# Altium PCB PX4FMUv2.4.6.PcbDoc (part 3 of 3)
Units mil, origin at the board's own origin, x right, y up, seen from the top; angles counter-clockwise.
Board outline 2756 x 1595 mil, 6 copper layers (Top, Ground, Horizontal, Vertical, Power, Bottom), stack 65.355 mil thick; 292 components, 264 nets, 1164 pads, 473 vias.
Unrouted connection lines stored in the file: 12.
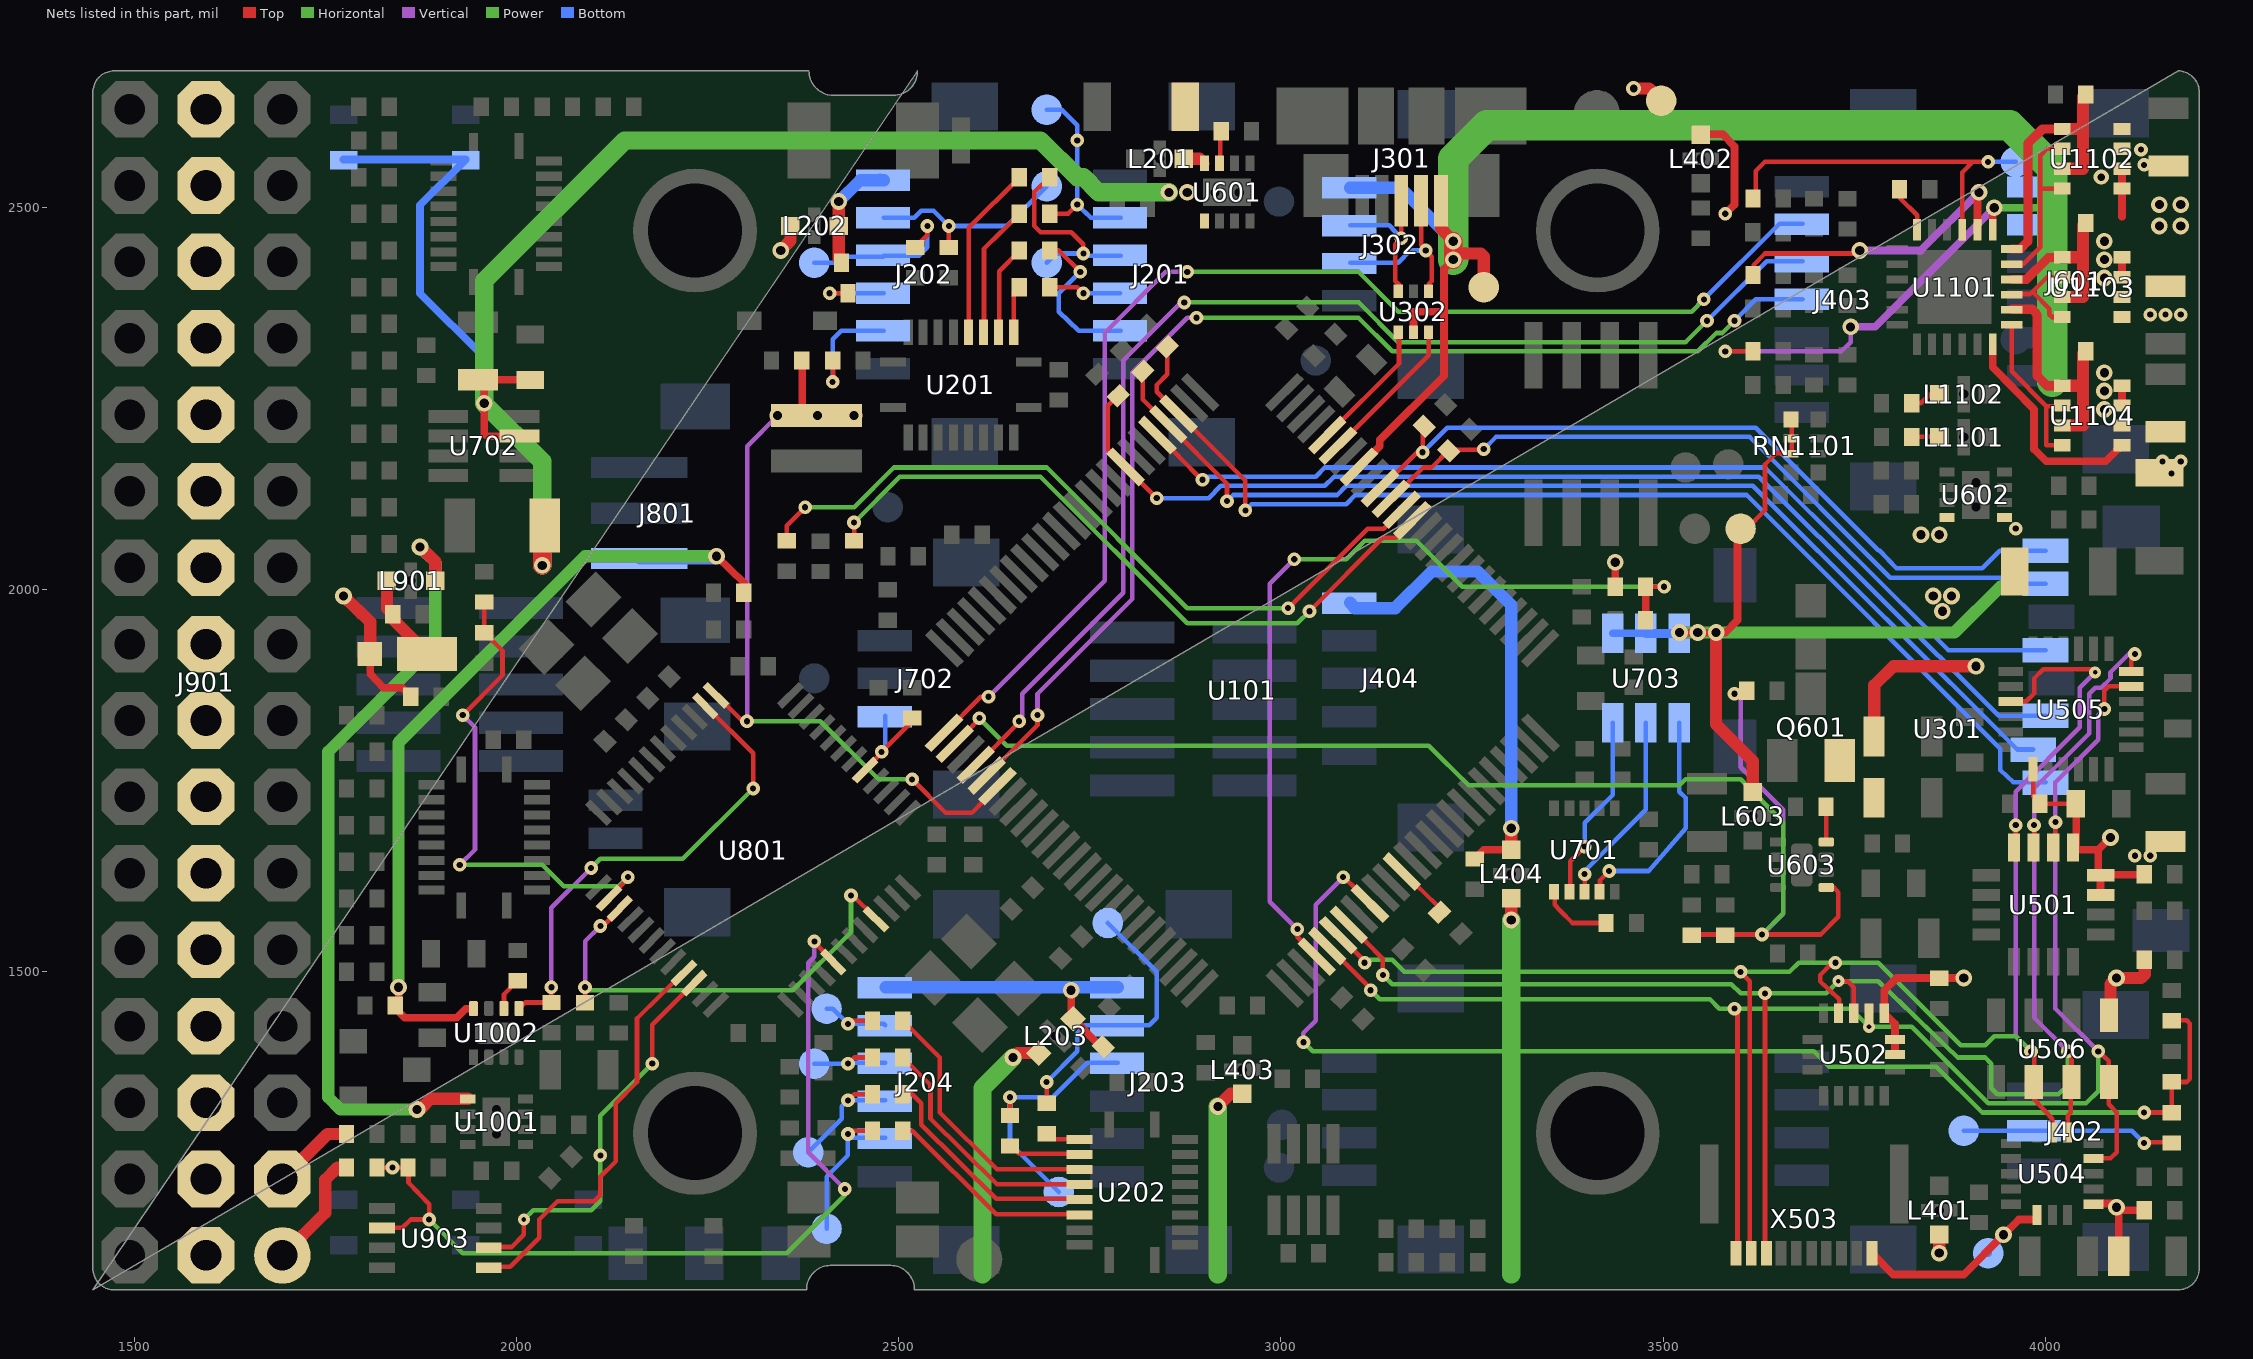
[diagram p7: the nets of this part, all layers, seen from the top]

## Via types
v1: diameter 17.84/17.84/17.84/17.84/17.84/17.84 (per signal layer), hole 8, Top to Bottom, 334 vias
v2: diameter 21.84/21.84/21.84/21.84/21.84/21.84 (per signal layer), hole 12, Top to Bottom, 129 vias
v3: diameter 15.84/15.84/15.84/15.84/15.84/15.84 (per signal layer), hole 6, Top to Bottom, 8 vias
v4: diameter 19.84/19.84/19.84/19.84/19.84/19.84 (per signal layer), hole 10, Top to Bottom, 2 vias

## Nets (pads, with @x,y where several pads share a name; then routed paths per layer and width w, separated by ;. In a path a pad name is that pad's centre, name@x,y a point inside that pad or via, vN(x,y) a via of type N, cw(c..) or ccw(c..) an arc to the next point about the centre after c; other vN are vias at no path point) (continued)
N$85: R203.P$1 U201.15 | length 231
  Top w6: U201.15@2591.4,2336.37 2591.4,2473.37 R203.P$1@2658.4,2539.37
N$86: R210.P$1 U201.14 | length 174.8
  Top w6: U201.14@2611.4,2336.37 2611.4,2445.37 R210.P$1@2658.4,2491.37
N$87: R204.P$1 U201.13 | length 118.2
  Top w6: U201.13@2631.4,2336.37 2631.4,2416.37 R204.P$1@2658.4,2443.37
N$88: R211.P$1 U201.12 | length 62.6
  Top w6: U201.12@2650.4,2336.37 2650.4,2388.37 R211.P$1@2658.4,2395.37
N$89: R207.P$1 U202.13 | length 96.3
  Top w6: R207.P$1@2645.4,1272.37 2657.4,1261.37 U202.13@2737.4,1261.37
N$90: R214.P$1 U202.12 | length 47.3
  Top w6: R214.P$1@2693.4,1288.37 2701.4,1280.37 U202.12@2737.4,1280.37
N$91: R205.P$1 U202.17 | length 276.9
  Top w6: R205.P$1@2505.4,1291.37 2517.4,1291.37 2627.4,1182.37 U202.17@2737.4,1182.37
N$92: R212.P$1 U202.16 | length 304.9
  Top w6: R212.P$1@2505.4,1339.37 2517.4,1339.37 2529.4,1327.37 2529.4,1299.37 2627.4,1202.37 U202.16@2737.4,1202.37
N$93: R206.P$1 U202.15 | length 326.2
  Top w6: R206.P$1@2505.4,1387.37 2541.4,1351.37 2541.4,1307.37 2628.4,1221.37 U202.15@2737.4,1221.37
N$94: R213.P$1 U202.14 | length 354.2
  Top w6: R213.P$1@2505.4,1435.37 2549.4,1391.37 2553.4,1387.37 2553.4,1315.37 2628.4,1241.37 U202.14@2737.4,1241.37
N$95: R704.P$2 U701.6 | length 96.3
  Top w6: U701.6@3358.4,1605.37 3358.4,1587.37 3365.4,1579.37 3381.4,1563.37 R704.P$2@3426.4,1563.37
N$96: R617.P$1 U601.7 | length 42.8
  Top w6: U601.7@2920.4,2557.37 2920.4,2597.37 R617.P$1@2922.4,2599.37
N$97: C1105.P$1 U1101.P$18 U1102.P$1 U1102.P$3 | length 359
  Top w12: U1101.P$18@3956.4,2445.37 3967.4,2445.37 3977.4,2455.37 3977.4,2583.37 3996.4,2602.37 U1102.P$1@4022.4,2602.37
  Top w16: U1102.P$3@4022.4,2550.37 4049.4,2550.37 4049.4,2602.37 ; U1102.P$1@4022.4,2602.37 4049.4,2602.37 ; C1105.P$1@4053.4,2647.37 4049.4,2644.37 4049.4,2602.37
N$98: D403.C J404.1 L404.P$2 | length 625.3
  Top w10: D403.C@3253.4,1647.37 3265.4,1659.37 L404.P$2@3301.4,1659.37
  Top w16: L404.P$2@3301.4,1659.37 v2(3301.4,1687.37)
  Bottom w16: J404.1@3090.4,1982.37 3096.4,1975.37 3149.4,1975.37 3197.4,2023.37 3257.4,2023.37 3301.4,1979.37 v2(3301.4,1687.37)
N$99: J901.4 R910.P$2 | length 109.4
  Top w16: J901.4@1693.4,1228.37 1752.4,1287.37 R910.P$2@1778.4,1287.37
N$100: D203.C J203.1 J204.1 L203.P$2 | length 400.9
  Top w10: v2(2725.4,1475.37) 2725.4,1440.37 2728.4,1438.37 2764.4,1401.37 D203.C@2767.4,1401.37
  Bottom w10: v2@2722.4,1479.37 v2(2725.4,1475.37)
  Bottom w16: J204.1@2482.4,1479.37 v2@2722.4,1479.37 ; v2(2725.4,1475.37) 2729.4,1479.37 J203.1@2786.4,1479.37
N$101: D202.C J202.1 L202.P$2 | length 158.4
  Top w10: D202.C@2421.4,2432.37 D202.C@2425.4,2427.37 ; L202.P$2@2421.4,2475.37 L202.P$2@2421.4,2476.37
  Top w16: D202.C@2421.4,2432.37 L202.P$2@2421.4,2475.37 ; L202.P$2@2421.4,2476.37 v2(2421.4,2507.37)
  Bottom w10: J202.1@2475.4,2539.37 J202.1@2480.4,2535.37
  Bottom w16: v2(2421.4,2507.37) 2449.4,2535.37 J202.1@2480.4,2535.37
N$102: L1102.P$2 R1102.P$2 | length 42
  Top w6: R1102.P$2@3825.4,2243.37 3837.4,2243.37 3849.4,2255.37 L1102.P$2@3862.4,2255.37
N$103: L1101.P$2 R1101.P$2 | length 37
  Top w6: R1101.P$2@3825.4,2199.37 L1101.P$2@3862.4,2199.37
N$104: C1002.P$1 U1002.6 | length 44.5
  Top w6: U1002.6@1983.4,1451.37 1983.4,1470.37 C1002.P$1@2001.4,1488.37
N$105: R1115.P$2 U1101.P$24 | length 62.1
  Top w6: R1115.P$2@3810.4,2523.37 3810.4,2511.37 3832.4,2489.37 U1101.P$24@3832.4,2470.37
N$106: C1106.P$1 U1101.P$16 U1103.P$1 U1103.P$3 | length 231
  Top w10: 4049.4,2382.37 4049.4,2383.37
  Top w12: U1101.P$16@3956.4,2405.37 3975.4,2405.37 4004.4,2434.37 U1103.P$1@4022.4,2434.37
  Top w16: U1103.P$3@4022.4,2382.37 4049.4,2382.37 ; U1103.P$1@4022.4,2434.37 4049.4,2434.37 ; 4049.4,2383.37 4049.4,2434.37 ; C1106.P$1@4053.4,2479.37 4049.4,2476.37 4049.4,2434.37
N$107: C1107.P$1 U1101.P$14 U1104.P$1 U1104.P$3 | length 307.6
  Top w10: 4049.4,2214.37 4049.4,2215.37
  Top w12: U1101.P$14@3956.4,2366.37 3983.4,2366.37 3989.4,2359.37 3989.4,2279.37 4002.4,2266.37 U1104.P$1@4022.4,2266.37
  Top w16: U1104.P$3@4022.4,2214.37 4049.4,2214.37 ; U1104.P$1@4022.4,2266.37 4049.4,2266.37 ; 4049.4,2215.37 4049.4,2266.37 ; C1107.P$1@4053.4,2311.37 4049.4,2308.37 4049.4,2266.37
N$109: U1101.P$13 U1104.P$2 U1104.P$4 | length 219.4
  Top w6: U1101.P$13@3956.4,2346.37 3956.4,2285.37 4001.4,2239.37 ; U1104.P$4@4022.4,2188.37 4001.4,2188.37 4001.4,2239.37 ; U1104.P$2@4022.4,2240.37 4022.4,2239.37 4001.4,2239.37
N$110: D903.C D904.CATHODE L901.P$1 | length 118
  Top w10: D903.C@1838.4,1960.37 D903.C@1838.4,1967.37
  Top w16: L901.P$1@1830.4,2011.37 1830.4,1975.37 D903.C@1838.4,1967.37 ; D903.C@1838.4,1960.37 D904.CATHODE@1883.4,1915.37
N$113: U1101.P$15 U1103.P$2 U1103.P$4 | length 132.5
  Top w6: U1101.P$15@3956.4,2386.37 3980.4,2386.37 3983.4,2389.37 ; U1103.P$4@4022.4,2356.37 4008.4,2356.37 4005.4,2359.37 4005.4,2367.37 3983.4,2389.37 ; U1103.P$2@4022.4,2408.37 4002.4,2408.37 3983.4,2389.37
N$115: U1101.P$17 U1102.P$2 U1102.P$4 | length 228.3
  Top w6: U1101.P$17@3956.4,2425.37 3971.4,2425.37 3993.4,2447.37 3993.4,2523.37 ; U1102.P$4@4022.4,2524.37 3994.4,2524.37 3993.4,2523.37 ; U1102.P$2@4022.4,2576.37 4002.4,2576.37 3993.4,2567.37 3993.4,2523.37
OTG_DM1: J301.D- J302.3 U302.1 | length 236.8
  Top w6: J301.D-@3183.4,2509.37 3183.4,2450.37 v1(3189.4,2443.37) ; U302.1@3193.4,2390.37 3193.4,2399.37 3197.4,2403.37 3197.4,2435.37 v1(3189.4,2443.37) ; v1@3193.4,2440.37 v1(3189.4,2443.37)
  Bottom w6: J302.3@3090.4,2427.37 3153.4,2427.37 3169.4,2443.37 v1(3189.4,2443.37)
OTG_DP1: J301.D+ J302.2 U302.3 | length 207.5
  Top w6: U302.3@3154.4,2390.37 3154.4,2399.37 3149.4,2403.37 3149.4,2451.37 v1(3157.4,2459.37) ; J301.D+@3157.4,2509.37 v1(3157.4,2459.37) ; v1(3157.4,2459.37) 3154.4,2456.37 v1(3157.4,2459.37)
  Bottom w6: J302.2@3090.4,2476.37 3141.4,2476.37 v1(3157.4,2459.37)
OTG_FS_DM: U101.70 U302.6 | length 197.9
  Top w6: U101.70@3075.4,2188.37 3193.4,2306.37 U302.6@3193.4,2337.37
OTG_FS_DP: U101.71 U302.4 | length 173.5
  Top w6: U101.71@3061.4,2202.37 3154.4,2295.37 U302.4@3154.4,2337.37
PB2-BOOT1: R102.P$1 U101.37 | length 75
  Top w6: U101.37@3158.4,1631.37 3208.4,1582.37 R102.P$1@3208.4,1577.37
PPM-SBUS-PROT: J901.1 R909.P$2 | length 157.8
  Top w16: J901.1@1693.4,1128.37 1749.4,1184.37 1749.4,1227.37 1765.4,1243.37 R909.P$2@1778.4,1243.37
PPM_INPUT: D901.C R909.P$1 U801.29 U903.2 | length 1170.7
  Top w6: R909.P$1@1817.4,1243.37 v1(1837.4,1243.37) 1858.4,1243.37 1858.4,1223.37 1885.4,1195.37 v1(1885.4,1175.37) 1861.4,1175.37 1850.4,1164.37 U903.2@1824.4,1164.37 ; v1(2389.4,1539.37) 2389.4,1538.37 U801.29@2414.4,1513.37
  Horizontal w6: v1(1885.4,1175.37) 1929.4,1131.37 2353.4,1131.37 2429.4,1207.37 v1(2429.4,1215.37)
  Vertical w6: v1(2389.4,1539.37) 2389.4,1519.37 2381.4,1511.37 2381.4,1263.37 v1(2429.4,1215.37)
PRESSURE_SENS: C401.P$1 R403.P$2 R406.P$1 U101.34 | length 1626.9
  Top w6: v1(3081.4,1623.37) 3082.4,1623.37 U101.34@3117.4,1589.37 ; v1(4129.4,1315.37) 4130.4,1315.37 4165.4,1315.37 4165.4,1356.37 4166.4,1355.37 4185.4,1355.37 4189.4,1359.37 4189.4,1431.37 4185.4,1436.37 R403.P$2@4165.4,1436.37
  Horizontal w6: v1(3029.4,1407.37) 3041.4,1395.37 3697.4,1395.37 3717.4,1375.37 3857.4,1375.37 3917.4,1315.37 v1(4129.4,1315.37)
  Vertical w6: v1(3029.4,1407.37) 3029.4,1419.37 3045.4,1435.37 3045.4,1587.37 v1(3081.4,1623.37)
PRESSURE_SENS_IN: ADC_PR.P$1 J402.2 R406.P$2 | length 279
  Top w6: v1(4129.4,1275.37) 4130.4,1276.37 R406.P$2@4165.4,1276.37
  Bottom w6: ADC_PR.P$1@3893.4,1291.37 3986.4,1291.37 4113.4,1291.37 v1(4129.4,1275.37)
RGB_LED_3: U701.9 U703.C1 | length 298
  Top w6: U701.9@3417.4,1605.37 3417.4,1619.37 v1(3429.4,1631.37)
  Bottom w6: v1(3429.4,1631.37) 3481.4,1631.37 3529.4,1687.37 3529.4,1727.37 3521.4,1735.37 U703.C1@3521.4,1825.37
RGB_LED_4: U701.8 U703.C2 | length 253.1
  Top w6: U701.8@3397.4,1605.37 v1(3397.4,1627.37)
  Bottom w6: v1(3397.4,1627.37) 3397.4,1631.37 3477.4,1711.37 U703.C2@3477.4,1825.37
RGB_LED_14: U701.7 U703.C3 | length 243.2
  Top w6: U701.7@3378.4,1605.37 3378.4,1644.37 v1(3397.4,1663.37)
  Bottom w6: v1(3397.4,1663.37) 3397.4,1694.37 3434.4,1731.37 U703.C3@3434.4,1825.37
RSSI_IN: R901.P$1 U801.15 U801.33 | length 619.5
  Top w6: R901.P$1@2089.4,1459.37 v1(2089.4,1479.37) ; v1(2109.4,1559.37) 2112.4,1559.37 U801.15@2136.4,1583.37 ; v1(2437.4,1599.37) 2439.4,1599.37 U801.33@2470.4,1569.37
  Horizontal w6: v1(2089.4,1479.37) 2093.4,1475.37 2361.4,1475.37 2437.4,1551.37 v1(2437.4,1599.37)
  Vertical w6: v1(2089.4,1479.37) 2089.4,1539.37 v1(2109.4,1559.37)
RX-VDD_5V5: J901.2
SAFETY: J702.3 R713.P$1 U801.41 | length 142.1
  Top w6: U801.41@2456.4,1764.37 2477.4,1786.37 v1(2477.4,1787.37) 2517.4,1827.37 R713.P$1@2517.4,1832.37
  Bottom w6: v1(2477.4,1787.37) 2482.4,1792.37 J702.3@2482.4,1834.37
SBUS_INPUT: U801.22 U903.6 | length 520.9
  Top w6: U903.6@1963.4,1139.37 1993.4,1139.37 2009.4,1155.37 v3(2009.4,1175.37) ; v1(2177.4,1379.37) 2177.4,1430.37 U801.22@2233.4,1486.37
  Horizontal w6: v3(2009.4,1175.37) 2021.4,1187.37 2097.4,1187.37 2109.4,1199.37 v1(2109.4,1259.37) 2109.4,1311.37 v1(2177.4,1379.37)
SBUS_OUTPUT: U801.21 U903.5 | length 536.9
  Top w6: U903.5@1963.4,1113.37 1991.4,1113.37 2029.4,1151.37 2029.4,1175.37 2053.4,1199.37 2101.4,1199.37 2109.4,1207.37 2109.4,1231.37 2129.4,1251.37 2129.4,1327.37 2157.4,1355.37 2157.4,1438.37 U801.21@2219.4,1499.37
SDIO_CK: U101.80 U301.5 | length 1292.1
  Top w6: U101.80@2838.4,2202.37 2896.4,2143.37 v1(2897.4,2143.37)
  Bottom w6: v1(2897.4,2143.37) 2901.4,2147.37 3045.4,2147.37 3057.4,2159.37 3633.4,2159.37 3873.4,1920.37 U301.5@4000.4,1920.37
SDIO_CMD: R303.P$1 U101.83 U301.3 | length 1471.3
  Top w6: R303.P$1@2787.4,2254.37 2773.4,2240.37 2773.4,2183.37 2796.4,2160.37 v1(2837.4,2119.37)
  Bottom w6: v1(2837.4,2119.37) 2905.4,2119.37 2921.4,2135.37 3057.4,2135.37 3069.4,2147.37 3073.4,2147.37 3625.4,2147.37 3939.4,1834.37 U301.3@4000.4,1834.37
SDIO_D0: R304.P$1 U101.65 U301.7 | length 968.5
  Top w6: U101.65@3144.4,2118.37 3186.4,2159.37 3197.4,2159.37 3220.4,2182.37 3264.4,2182.37 v1(3265.4,2183.37)
  Bottom w6: v1(3265.4,2183.37) 3281.4,2199.37 3613.4,2199.37 3797.4,2015.37 3941.4,2015.37 3950.4,2007.37 U301.7@4000.4,2007.37
SDIO_D1: R305.P$1 U101.66 U301.8 | length 1024.5
  Top w6: U101.66@3130.4,2132.37 3178.4,2179.37 v1(3185.4,2179.37) 3185.4,2211.37 R305.P$1@3188.4,2214.37
  Bottom w6: v1(3185.4,2179.37) 3217.4,2211.37 3621.4,2211.37 3781.4,2051.37 3783.4,2050.37 3805.4,2027.37 3917.4,2027.37 3940.4,2050.37 U301.8@4000.4,2050.37
SDIO_D2: R301.P$1 U101.78 U301.1 | length 1496
  Top w6: R301.P$1@2851.4,2318.37 2851.4,2281.37 2837.4,2267.37 2837.4,2258.37 2866.4,2229.37 2953.4,2142.37 v1(2953.4,2103.37)
  Bottom w6: v1(2953.4,2103.37) 2961.4,2111.37 3085.4,2111.37 3097.4,2123.37 3609.4,2123.37 3941.4,1791.37 3941.4,1763.37 3958.4,1747.37 U301.1@4000.4,1747.37
SDIO_D3: R302.P$1 U101.79 U301.2 | length 1422.5
  Top w6: R302.P$1@2819.4,2286.37 2819.4,2248.37 2852.4,2215.37 2929.4,2138.37 v1(2929.4,2115.37)
  Bottom w6: v1(2929.4,2115.37) 2937.4,2123.37 3073.4,2123.37 3085.4,2135.37 3617.4,2135.37 3963.4,1790.37 U301.2@3984.4,1790.37
SERIAL1_CTS: J201.4 R211.P$2 | length 95.3
  Top w6: R211.P$2@2697.4,2395.37 2733.4,2395.37 v1(2741.4,2387.37)
  Bottom w6: v1(2741.4,2387.37) J201.4@2789.4,2387.37
SERIAL1_RTS: J201.5 R204.P$2 | length 206.3
  Top w6: R204.P$2@2697.4,2443.37 2709.4,2443.37 v1(2737.4,2415.37)
  Bottom w6: v1(2737.4,2415.37) 2709.4,2387.37 2709.4,2363.37 2735.4,2338.37 J201.5@2790.4,2338.37
SERIAL1_RX: J201.3 R203.P$2 S1RX.P$1 | length 261.5
  Top w6: R203.P$2@2697.4,2539.37 2677.4,2520.37 2677.4,2475.37 2685.4,2467.37 2725.4,2467.37 2741.4,2451.37 v1(2741.4,2439.37)
  Bottom w6: S1RX.P$1@2693.4,2427.37 2705.4,2439.37 v1(2741.4,2439.37) 2745.4,2436.37 J201.3@2790.4,2436.37
SERIAL1_TX: J201.2 R210.P$2 S1TX.P$1 | length 257
  Top w6: R210.P$2@2697.4,2491.37 2721.4,2491.37 v1(2733.4,2503.37)
  Bottom w6: S1TX.P$1@2693.4,2627.37 2713.4,2627.37 2733.4,2607.37 v1(2733.4,2587.37) v1(2733.4,2503.37) 2751.4,2486.37 J201.2@2790.4,2486.37
SERIAL2_CTS: J202.4 R208.P$2 | length 96
  Top w6: v1(2409.4,2387.37) R208.P$2@2434.4,2387.37
  Bottom w6: v1(2409.4,2387.37) J202.4@2479.4,2387.37 J202.4@2480.4,2387.37
SERIAL2_RTS: J202.5 R201.P$2 | length 156
  Top w6: v1(2413.4,2271.37) 2414.4,2272.37 R201.P$2@2414.4,2299.37
  Bottom w6: v1(2413.4,2271.37) 2413.4,2327.37 2424.4,2338.37 J202.5@2480.4,2338.37
SERIAL2_RX: J202.3 R202.P$2 S2RX.P$1 | length 218.9
  Top w6: R202.P$2@2521.4,2447.37 2537.4,2463.37 v1(2537.4,2475.37)
  Bottom w6: S2RX.P$1@2389.4,2427.37 2425.4,2427.37 2433.4,2435.37 2479.4,2435.37 2480.4,2436.37 2526.4,2436.37 2537.4,2447.37 v1(2537.4,2475.37)
SERIAL2_TX: J202.2 R209.P$2 S2TX.P$1 | length 274.6
  Top w6: R209.P$2@2565.4,2447.37 v1(2565.4,2475.37)
  Bottom w6: J202.2@2480.4,2486.37 2520.4,2486.37 2529.4,2495.37 2545.4,2495.37 v1(2565.4,2475.37) 2641.4,2475.37 S2TX.P$1@2693.4,2527.37
SERIAL3_RX: J203.3 R207.P$2 S3RX.P$1 | length 334.1
  Top w6: R207.P$2@2645.4,1311.37 v1(2645.4,1335.37)
  Bottom w6: S3RX.P$1@2709.4,1211.37 2645.4,1275.37 v1(2645.4,1335.37) 2701.4,1335.37 2746.4,1380.37 J203.3@2786.4,1380.37
SERIAL3_TX: J203.2 R214.P$2 S3TX.P$1 | length 371.4
  Top w6: R214.P$2@2693.4,1327.37 v1(2693.4,1355.37)
  Bottom w6: v1(2693.4,1355.37) 2733.4,1395.37 2733.4,1419.37 2743.4,1429.37 2786.4,1429.37 2827.4,1429.37 2837.4,1439.37 2837.4,1499.37 S3TX.P$1@2773.4,1563.37
SERIAL4_RX: J204.3 R206.P$2 S4RX.P$1 | length 129.7
  Top w6: v1(2433.4,1379.37) 2441.4,1387.37 R206.P$2@2466.4,1387.37
  Bottom w6: S4RX.P$1@2389.4,1379.37 v1(2433.4,1379.37) 2434.4,1380.37 J204.3@2482.4,1380.37
SERIAL4_TX: J204.2 R213.P$2 S4TX.P$1 | length 120.8
  Top w6: v1(2433.4,1431.37) 2437.4,1435.37 R213.P$2@2466.4,1435.37
  Bottom w6: S4TX.P$1@2405.4,1451.37 2413.4,1451.37 v1(2433.4,1431.37) 2480.4,1431.37 J204.2@2482.4,1429.37
SERIAL5_RX: J204.5 R205.P$2 S5_RX.P$1 | length 221.1
  Top w6: v1(2433.4,1287.37) 2437.4,1291.37 R205.P$2@2466.4,1291.37
  Bottom w6: S5_RX.P$1@2405.4,1163.37 2405.4,1231.37 2433.4,1259.37 v1(2433.4,1287.37) 2439.4,1282.37 J204.5@2482.4,1282.37
SERIAL5_TX: J204.4 R212.P$2 S5_TX.P$1 | length 174.9
  Top w6: v1(2433.4,1331.37) 2441.4,1339.37 R212.P$2@2466.4,1339.37
  Bottom w6: S5_TX.P$1@2381.4,1263.37 2425.4,1307.37 2425.4,1323.37 v1(2433.4,1331.37) 2481.4,1331.37 J204.4@2482.4,1331.37
SERIAL_FMU_TO_IO: R804.P$2 U101.63 | length 915.3
  Top w6: R804.P$2@2441.4,2063.37 v1(2441.4,2087.37) ; v1(3037.4,1971.37) 3133.4,2067.37 3149.4,2067.37 U101.63@3172.4,2090.37
  Horizontal w6: v1(2441.4,2087.37) 2501.4,2147.37 2685.4,2147.37 2877.4,1955.37 3021.4,1955.37 v1(3037.4,1971.37)
SERIAL_IO_TO_FMU: R803.P$2 U101.64 | length 986.4
  Top w6: R803.P$2@2353.4,2063.37 2353.4,2083.37 v1(2377.4,2107.37) ; v1(3009.4,1975.37) 3113.4,2079.37 3134.4,2079.37 U101.64@3158.4,2104.37
  Horizontal w6: v1(2377.4,2107.37) 2441.4,2107.37 2493.4,2159.37 2693.4,2159.37 2877.4,1975.37 v1(3009.4,1975.37)
SPI_EXT_MISO: J403.3 U101.4 | length 1593.8
  Top w6: U101.4@2602.4,1770.37 2657.4,1826.37 v1(2657.4,1827.37)
  Horizontal w6: v1(2873.4,2375.37) 3101.4,2375.37 3153.4,2323.37 3529.4,2323.37 v1(3557.4,2351.37)
  Vertical w6: v1(2657.4,1827.37) 2661.4,1831.37 2661.4,1863.37 2793.4,1995.37 2793.4,2299.37 2869.4,2375.37 v1(2873.4,2375.37)
  Bottom w6: v1(3557.4,2351.37) 3635.4,2429.37 J403.3@3682.4,2429.37
SPI_EXT_MOSI: J403.4 U101.5 | length 1558.9
  Top w6: U101.5@2615.4,1756.37 2681.4,1822.37 v1(2681.4,1835.37)
  Horizontal w6: v1(2889.4,2355.37) 3101.4,2355.37 3145.4,2311.37 3545.4,2311.37 3569.4,2335.37 3577.4,2335.37 v1(3593.4,2351.37)
  Vertical w6: v1(2681.4,1835.37) 2681.4,1863.37 2805.4,1987.37 2805.4,2283.37 2877.4,2355.37 v1(2889.4,2355.37)
  Bottom w6: v1(3593.4,2351.37) 3621.4,2379.37 J403.4@3682.4,2379.37
SPI_EXT_SCK: J403.2 U101.1 | length 1630.7
  Top w6: U101.1@2560.4,1812.37 2607.4,1859.37 v1(2617.4,1859.37)
  Horizontal w6: v1(2877.4,2415.37) 3101.4,2415.37 3153.4,2363.37 3537.4,2363.37 v1(3553.4,2379.37)
  Vertical w6: v1(2617.4,1859.37) 2769.4,2011.37 2769.4,2335.37 2849.4,2415.37 v1(2877.4,2415.37)
  Bottom w6: v1(3553.4,2379.37) 3652.4,2478.37 J403.2@3682.4,2478.37
SPI_INT_MISO: U101.31 U501.4 U502.4 U504.7 U505.9 U506.6 X503.9 | length 2293.4
  Top w6: U101.31@3075.4,1547.37 3109.4,1513.37 v1(3109.4,1511.37) ; v1(3601.4,1499.37) 3613.4,1487.37 3613.4,1143.37 3616.4,1141.37 X503.9@3616.4,1131.37 ; v1(3725.4,1511.37) 3721.4,1511.37 3705.4,1495.37 3705.4,1487.37 3730.4,1463.37 U502.4@3730.4,1445.37 ; U505.9@3955.4,1853.37 3975.4,1853.37 3985.4,1863.37 3985.4,1883.37 3997.4,1895.37 4061.4,1895.37 v3(4065.4,1891.37) ; U501.4@3961.4,1660.37 3959.4,1662.37 3961.4,1665.37 v1(3961.4,1691.37) ; v1(3981.4,1395.37) 3985.4,1392.37 3985.4,1356.37 3985.4,1332.37 4009.4,1307.37 U504.7@4009.4,1289.37
  Horizontal w6: v1(3109.4,1511.37) 3113.4,1515.37 3145.4,1515.37 3161.4,1499.37 v1(3601.4,1499.37) 3665.4,1499.37 3677.4,1511.37 v1(3725.4,1511.37) 3781.4,1511.37 3889.4,1403.37 3921.4,1403.37 3933.4,1415.37 3961.4,1415.37 v1(3981.4,1395.37)
  Vertical w6: v1(3981.4,1395.37) 3961.4,1415.37 v1(3961.4,1691.37) 3961.4,1735.37 4045.4,1819.37 4045.4,1871.37 v3(4065.4,1891.37)
SPI_INT_MOSI: U101.32 U501.3 U502.3 U504.6 U505.24 U506.7 X503.8 | length 2294.7
  Top w6: U101.32@3089.4,1561.37 3133.4,1516.37 v1(3133.4,1495.37) ; v1(3633.4,1471.37) 3633.4,1143.37 3636.4,1141.37 X503.8@3636.4,1131.37 ; v3(3729.4,1487.37) 3741.4,1487.37 3749.4,1479.37 U502.3@3749.4,1445.37 ; U501.3@3985.4,1667.37 3985.4,1662.37 3985.4,1663.37 v1(3985.4,1691.37) ; U504.6@4029.4,1289.37 4029.4,1311.37 4033.4,1315.37 4033.4,1356.37 4034.4,1356.37 4034.4,1391.37 v1(4029.4,1395.37) ; U505.24@4112.4,1893.37 4112.4,1910.37 v1(4117.4,1915.37)
  Horizontal w6: v1(3133.4,1495.37) 3145.4,1483.37 3589.4,1483.37 3601.4,1471.37 v1(3633.4,1471.37) 3713.4,1471.37 v3(3729.4,1487.37) 3781.4,1487.37 3885.4,1387.37 3921.4,1387.37 3929.4,1379.37 3929.4,1347.37 3937.4,1339.37 4017.4,1339.37 4029.4,1351.37 v1(4029.4,1395.37)
  Vertical w6: v1(4029.4,1395.37) 3985.4,1439.37 v1(3985.4,1691.37) 3985.4,1739.37 4057.4,1811.37 4057.4,1863.37 4065.4,1871.37 4073.4,1871.37 4085.4,1883.37 4085.4,1891.37 4109.4,1915.37 v1(4117.4,1915.37)
SPI_INT_SCK: U101.30 U501.2 U502.2 U504.4 U505.23 U506.8 X503.10 | length 2261.7
  Top w6: U101.30@3061.4,1533.37 3117.4,1477.37 v1(3117.4,1475.37) ; v1(3593.4,1451.37) 3597.4,1447.37 3597.4,1147.37 3596.4,1146.37 X503.10@3596.4,1131.37 ; v3(3769.4,1427.37) 3769.4,1428.37 U502.2@3769.4,1445.37 ; U501.2@4010.4,1662.37 4013.4,1666.37 v1(4013.4,1695.37) ; U504.4@4063.4,1255.37 4085.4,1255.37 4093.4,1263.37 4093.4,1315.37 4083.4,1326.37 4083.4,1356.37 4083.4,1382.37 v1(4069.4,1395.37) ; v1(4077.4,1843.37) 4077.4,1867.37 4083.4,1873.37 U505.23@4112.4,1873.37
  Horizontal w6: v1(3117.4,1475.37) 3129.4,1463.37 3561.4,1463.37 3573.4,1451.37 v1(3593.4,1451.37) 3745.4,1451.37 v3(3769.4,1427.37) 3825.4,1427.37 3925.4,1327.37 4053.4,1327.37 4069.4,1343.37 v1(4069.4,1395.37)
  Vertical w6: v1(4069.4,1395.37) 4013.4,1451.37 v1(4013.4,1695.37) 4013.4,1747.37 4069.4,1803.37 4069.4,1835.37 v1(4077.4,1843.37)
VBAT: B601.1 R608.P$1 U101.6 U801.1 | length 1037.6
  Top w6: U801.1@2261.4,1861.37 2295.4,1827.37 v1(2301.4,1827.37) ; v2(2341.4,2227.37) 2369.4,2227.37 2391.4,2227.37 2392.4,2226.37 v2(2393.4,2227.37) v2(2441.4,2227.37) ; v1(2517.4,1751.37) 2561.4,1707.37 2595.4,1707.37 U101.6@2629.4,1742.37
  Top w10: B601.1@2369.4,2227.37 2373.4,2231.37 R608.P$1@2373.4,2299.37
  Horizontal w6: v1(2301.4,1827.37) 2397.4,1827.37 2473.4,1751.37 v1(2517.4,1751.37)
  Vertical w6: v1(2301.4,1827.37) 2301.4,2187.37 v2(2341.4,2227.37)
VBUS: C1103.P$1 J301.VBUS J302.1 R1112.P$1 U101.68 U302.5 U1101.P$19 U1104.P$7 U1104.P$8 VBUS.P$1 | length 2570.3
  Top w6: v1(3581.4,2311.37) R1112.P$1@3618.4,2311.37
  Top w10: U101.68@3103.4,2160.37 3129.4,2187.37 3129.4,2195.37 3213.4,2279.37 3213.4,2363.37 ; U302.5@3173.4,2337.37 3173.4,2363.37 3213.4,2363.37 ; v2(3225.4,2431.37) 3213.4,2419.37 3213.4,2363.37 ; U1101.P$19@3931.4,2470.37 3931.4,2497.37 v2(3933.4,2499.37) ; U1104.P$7@4100.4,2240.37 U1104.P$8@4100.4,2266.37
  Top w16: J301.VBUS@3209.4,2509.37 3209.4,2472.37 v2(3225.4,2455.37) ; v2(3225.4,2431.37) 3233.4,2439.37 3261.4,2439.37 3265.4,2435.37 VBUS.P$1@3265.4,2395.37
  Top w24: v2(3225.4,2431.37) v2(3225.4,2455.37)
  Horizontal w10: v2(3933.4,2499.37) 4005.4,2499.37 4009.4,2495.37
  Horizontal w40: v2(3225.4,2431.37) 3225.4,2563.37 3269.4,2607.37 3953.4,2607.37 4009.4,2551.37 4009.4,2495.37 4009.4,2271.37
  Vertical w6: v1(3581.4,2311.37) 3733.4,2311.37 3745.4,2323.37 v2(3745.4,2343.37)
  Vertical w10: v2(3745.4,2343.37) 3777.4,2343.37 v2(3933.4,2499.37)
  Bottom w16: J302.1@3090.4,2525.37 3156.4,2525.37 v2(3225.4,2455.37)
  other v2: 4077.4,2235.37 4077.4,2259.37 4077.4,2283.37
VDD_3V3_SENSORS: C501.P$1 C502.P$1 C503.P$1 C506.P$1 C507.P$1 C508.P$1 C511.P$1 C513.P$1 C514.P$1 C605.P$1 C617.P$1 Q601.E U501.1 U501.15 U501.16 U502.1 U502.15 U502.16 U504.1 U504.14 U505.13 U506.1 U603.8 VDDA_3V1101.P$1 X503.1 | length 1357.6
  Top w6: U603.8@3713.4,1669.37 C617.P$1@3713.4,1715.37 ; U505.13@3984.4,1765.37 3984.4,1728.37 3993.4,1719.37 C513.P$1@4040.4,1719.37 ; U501.1@4036.4,1662.37 U501.1@4040.4,1666.37
  Top w10: X503.1@3773.4,1131.37 3801.4,1103.37 3893.4,1103.37 v2(3945.4,1155.37) 3965.4,1175.37 3990.4,1175.37 U504.14@3990.4,1182.37 ; U502.15@3803.4,1391.37 3803.4,1411.37 3803.4,1431.37 3789.4,1445.37 3789.4,1446.37 3789.4,1475.37 3805.4,1491.37 3861.4,1491.37 3862.4,1491.37 v2(3893.4,1491.37) ; U501.1@4036.4,1662.37 4036.4,1659.37 4069.4,1659.37 ; U501.1@4040.4,1666.37 C513.P$1@4040.4,1719.37 ; U504.1@4063.4,1196.37 4089.4,1196.37 v2(4093.4,1191.37) ; U501.15@4072.4,1600.37 U501.16@4072.4,1626.37 ; U506.1@4083.4,1443.37 U506.1@4083.4,1453.37 ; v2(4085.4,1675.37) 4069.4,1659.37 ; C506.P$1@4096.4,1127.37 4096.4,1189.37 v2(4093.4,1191.37) ; C507.P$1@4130.4,1187.37 4097.4,1187.37 v2(4093.4,1191.37) ; C502.P$1@4130.4,1627.37 4128.4,1626.37 U501.16@4072.4,1626.37 ; 4069.4,1659.37 4069.4,1626.37 U501.16@4072.4,1626.37
  Top w12: C605.P$1@3776.4,1727.37 C605.P$1@3776.4,1739.37
  Top w16: C501.P$1@3776.4,1807.37 3776.4,1874.37 3801.4,1899.37 v2(3909.4,1899.37) ; U506.1@4083.4,1443.37 4085.4,1445.37 4085.4,1483.37 v2(4093.4,1491.37) 4125.4,1491.37 4130.4,1496.37 C508.P$1@4130.4,1515.37
  Bottom w10: VDDA_3V1101.P$1@3925.4,1131.37 3925.4,1135.37 v2(3945.4,1155.37)
  other v1: 4117.4,1651.37 4137.4,1651.37
VDD_3V3_SENSORS_EN: R603.P$2 R620.P$2 R635.P$2 U101.2 U603.5 | length 1945.6
  Top w6: U101.2@2574.4,1798.37 2605.4,1830.37 v1(2605.4,1831.37) ; R635.P$2@3537.4,1548.37 3581.4,1548.37 v1(3629.4,1548.37) 3706.4,1548.37 3729.4,1571.37 3729.4,1603.37 3723.4,1610.37 U603.5@3713.4,1610.37 ; v1(3593.4,1863.37) 3597.4,1867.37 R620.P$2@3610.4,1867.37
  Horizontal w6: v1(2605.4,1831.37) 2641.4,1795.37 3193.4,1795.37 3245.4,1743.37 3521.4,1743.37 3529.4,1751.37 3601.4,1751.37 3657.4,1695.37 3657.4,1576.37 v1(3629.4,1548.37)
  Vertical w6: v1(3593.4,1863.37) 3601.4,1855.37 3601.4,1767.37 3657.4,1711.37 3657.4,1575.37 3629.4,1547.37 v1(3629.4,1548.37)
VDD_3V3_SPEKTRUM: C1008.P$1 D801.C J801.P$1 U1002.8 | length 1146.5
  Top w8: C1008.P$1@1841.4,1455.37 C1008.P$1@1845.4,1451.37
  Top w10: v2(1845.4,1479.37) 1845.4,1451.37 1845.4,1447.37 1853.4,1439.37 1921.4,1439.37 1933.4,1451.37 U1002.8@1944.4,1451.37 ; v2(2261.4,2043.37) 2297.4,2008.37 D801.C@2297.4,1995.37
  Power w16: v2(1845.4,1479.37) 1845.4,1799.37 2089.4,2043.37 v2(2261.4,2043.37)
  Bottom w16: J801.P$1@2161.4,2040.37 2258.4,2040.37 v2(2261.4,2043.37)
VDD_3V3_SPEKTRUM_EN: R1002.P$2 U801.2 U1002.5 | length 631.6
  Top w6: U1002.5@2003.4,1451.37 2011.4,1459.37 R1002.P$2@2045.4,1459.37 v1(2045.4,1479.37) ; U801.2@2247.4,1847.37 2309.4,1785.37 v1(2309.4,1739.37)
  Horizontal w6: v1(2097.4,1635.37) 2109.4,1647.37 2217.4,1647.37 v1(2309.4,1739.37)
  Vertical w6: v1(2045.4,1479.37) 2045.4,1583.37 v1(2097.4,1635.37)
VDD_5V_BRICK: C1101.P$1 J601.1 J601.2 R1105.P$1 U1101.P$21 U1102.P$7 U1102.P$8 VDD_5V_BRICK.P$1 | length 480.4
  Top w6: R1105.P$1@3618.4,2511.37 3621.4,2515.37 3621.4,2547.37 3633.4,2559.37 3905.4,2559.37 ; U1101.P$21@3891.4,2470.37 3891.4,2545.37 3905.4,2559.37 ; v1(3925.4,2559.37) 3905.4,2559.37
  Top w16: C1101.P$1@4159.4,2551.37 C1101.P$1@4161.4,2554.37
  Bottom w6: v1(3925.4,2559.37) VDD_5V_BRICK.P$1@3961.4,2559.37
  other v1: 4129.4,2555.37 4125.4,2575.37
  other v4: 4073.4,2539.37
VDD_5V_HIPOWER: C614.P$1 L201.P$1 U601.8 | length 29.2
  Top w12: 2893.4,2563.37 U601.8@2900.4,2557.37
  Top w16: L201.P$1@2873.4,2563.37 2893.4,2563.37
VDD_5V_IN: C702.P$1 C1104.P$1 F1001.1 L603.P$1 L701.P$1 LED701.A LED704.A R609.P$2 RN1101.5 RN1101.6 RN1101.7 U601.1 U602.1 U702.3 U703.A1 U703.A2 U703.A3 U1101.P$12 U1102.P$5 U1102.P$6 U1103.P$5 U1103.P$6 U1104.P$5 U1104.P$6 VDD_5V_IN.P$1 | length 3734.4
  Top w6: VDD_5V_IN.P$1@3601.4,2079.37 3609.4,2079.37 3633.4,2103.37 3633.4,2163.37 3648.4,2178.37 3668.4,2178.37 3668.4,2197.37 RN1101.5@3668.4,2222.37
  Top w10: U702.3@2004.4,2200.37 1961.4,2200.37 1957.4,2203.37 v2(1957.4,2243.37) 1957.4,2266.37 1949.4,2274.37 C702.P$1@2017.4,2274.37 ; v2(3437.4,2035.37) R609.P$2@3437.4,2003.37 R609.P$2@3438.4,2003.37 ; v2(3521.4,1943.37) v2(3569.4,1943.37) 3581.4,1943.37 3597.4,1959.37 3597.4,2075.37 VDD_5V_IN.P$1@3601.4,2079.37 ; U1101.P$12@3931.4,2321.37 3931.4,2290.37 3985.4,2235.37 3985.4,2183.37 4001.4,2167.37 4079.4,2167.37 U1104.P$5@4100.4,2188.37 U1104.P$5@4100.4,2187.37 ; 4100.4,2487.37 U1102.P$5@4100.4,2524.37 ; 4100.4,2515.37 U1102.P$6@4100.4,2550.37
  Top w16: v2(3569.4,1943.37) 3569.4,1823.37 3617.4,1775.37 L603.P$1@3617.4,1735.37
  Top w24: v2(2033.4,2031.37) 2033.4,2080.37 F1001.1@2037.4,2083.37
  Horizontal w16: v2(3521.4,1943.37) 3881.4,1943.37 3941.4,2003.37
  Power w24: v2(2033.4,2031.37) 2033.4,2167.37 v2(1957.4,2243.37) 1957.4,2403.37 2141.4,2587.37 2685.4,2587.37 2733.4,2539.37 2741.4,2539.37 2761.4,2519.37 v2(2853.4,2519.37)
  Bottom w10: LED704.A@1773.4,2562.37 1933.4,2562.37 1873.4,2502.37 1873.4,2387.37 1957.4,2303.37 v2(1957.4,2243.37) ; U703.A3@3434.4,1942.37 U703.A2@3477.4,1942.37
  Bottom w12: U703.A2@3477.4,1942.37 U703.A1@3521.4,1942.37
  other v1: 3961.4,2079.37 4165.4,2151.37 4153.4,2167.37 4177.4,2167.37 4137.4,2359.37 4157.4,2359.37 4177.4,2359.37
  other v2: 3545.4,1943.37 4149.4,2475.37 4177.4,2475.37 4149.4,2503.37 4177.4,2503.37 2877.4,2519.37
VDD_5V_PERIPH: C618.P$1 L202.P$1 L203.P$1 L401.P$1 L402.P$1 L403.P$1 L404.P$1 U602.8 | length 1295.4
  Top w10: L402.P$1@3549.4,2595.37 3578.4,2595.37 3593.4,2579.37 3593.4,2503.37 v1(3581.4,2491.37)
  Top w16: v2(2345.4,2443.37) 2358.4,2456.37 L202.P$1@2358.4,2475.37 ; v2(2649.4,1387.37) 2655.4,1393.37 L203.P$1@2683.4,1393.37 ; v2(2917.4,1323.37) 2934.4,1340.37 L403.P$1@2949.4,1340.37 ; v2(3301.4,1567.37) L404.P$1@3301.4,1596.37 ; v2(3861.4,1131.37) L401.P$1@3861.4,1156.37
  Power w24: 2609.4,1103.37 2609.4,1347.37 v2(2649.4,1387.37) ; 2917.4,1103.37 v2(2917.4,1323.37) ; 3301.4,1103.37 v2(3301.4,1567.37)
  other v2: 3865.4,1971.37 3853.4,1991.37 3877.4,1991.37 3837.4,2071.37 3861.4,2071.37
VDD_5V_SENS: R609.P$1 R610.P$1 U101.29 | length 1145
  Top w6: v1(3021.4,1555.37) 3021.4,1545.37 U101.29@3047.4,1520.37 ; R609.P$1@3477.4,2003.37 v1(3501.4,2003.37)
  Top w10: R610.P$1@3477.4,1959.37 R609.P$1@3477.4,2003.37
  Horizontal w6: v1(3017.4,2039.37) 3085.4,2039.37 3109.4,2063.37 3177.4,2063.37 3237.4,2003.37 v1(3501.4,2003.37)
  Vertical w6: v1(3017.4,2039.37) 2985.4,2007.37 2985.4,1591.37 v1(3021.4,1555.37)
VDD_SERVO: C1102.P$1 D904.ANODE J901.5 J901.8 J901.11 J901.14 J901.17 J901.20 J901.23 J901.26 J901.29 J901.32 J901.35 J901.38 J901.41 J901.44 J901.47 R922.P$2 R1109.P$1 U1101.P$20 U1103.P$7 U1103.P$8 VDD_SERVO.P$1 | length 649.3
  Top w6: R1109.P$1@3618.4,2411.37 3618.4,2424.37 3633.4,2439.37 3753.4,2439.37 v2(3757.4,2443.37)
  Top w10: D904.ANODE@1808.4,1915.37 1808.4,1889.37 1825.4,1871.37 1850.4,1871.37 R922.P$2@1862.4,1859.37 ; U1101.P$20@3911.4,2470.37 3911.4,2517.37 v2(3913.4,2519.37) ; U1103.P$7@4100.4,2408.37 U1103.P$8@4100.4,2434.37
  Top w16: v2(1773.4,1991.37) 1808.4,1957.37 D904.ANODE@1808.4,1915.37 ; v4(3461.4,2655.37) 3481.4,2655.37 VDD_SERVO.P$1@3497.4,2639.37
  Vertical w10: v2(3757.4,2443.37) 3837.4,2443.37 v2(3913.4,2519.37)
  other v2: 4077.4,2407.37 4077.4,2431.37 4077.4,2455.37
VDD_SERVO_IN: L901.P$2 U1001.1 | length 1034.3
  Top w16: v2(1869.4,1319.37) 1873.4,1319.37 1887.4,1333.37 U1001.1@1936.4,1333.37 ; v2(1873.4,2055.37) 1893.4,2036.37 L901.P$2@1893.4,2011.37
  Power w16: v2(1869.4,1319.37) 1769.4,1319.37 1753.4,1335.37 1753.4,1787.37 1893.4,1927.37 1893.4,2035.37 v2(1873.4,2055.37)
VDD_SERVO_SENS: R918.P$1 R919.P$2 U801.14 | length 663.2
  Top w6: v1(1929.4,1835.37) 1981.4,1887.37 1981.4,1919.37 1957.4,1943.37 R919.P$2@1957.4,1984.37 ; U801.14@2122.4,1597.37 2145.4,1621.37 v1(2145.4,1623.37)
  Horizontal w6: v1(1925.4,1639.37) 2033.4,1639.37 2061.4,1611.37 2133.4,1611.37 v1(2145.4,1623.37)
  Vertical w6: v1(1925.4,1639.37) 1945.4,1659.37 1945.4,1819.37 v1(1929.4,1835.37)
pads on no net: J201.M$0 J201.M$1 J202.M$0 J202.M$1 J203.M$0 J203.M$1 J204.M$0 J204.M$1 J301.GND5 J301.GND6 J301.ID J302.M$0 J302.M$1 J401.M$0 J401.M$1 J402.M$0 J402.M$1 J403.M$0 J403.M$1 J404.M$0 J404.M$1 J405.M$0 J405.M$1 J601.M$0 J601.M$1 J701.M$0 J701.M$1 J702.M$0 J702.M$1 J801.P$4 J801.P$5 JP1.1 JP2.1 JX301.7 JX301.8 JX301.10 JX802.7 JX802.8 JX802.10 M3_MOUNT1101.P$1 M3_MOUNT1102.P$1 M3_MOUNT1103.P$1 M3_MOUNT1104.P$1 RN1101.1 RN1101.8 S601.A2 S601.B4 S801.A2 S801.B4 U101.16 U202.1 U202.3 U202.18 U202.20 U301.NC U301.NC1 U301.NC2 U301.NC3 U501.7 U502.7 U502.8 U505.2 U505.3 U505.4 U505.5 U505.6 U505.7 U505.11 U505.14 U505.15 U505.16 U505.17 U505.19 U505.21 U505.22 U506.4 U601.3 U602.3 U801.3 U801.4 U801.25 U801.32 U801.42 U801.43 U901.8 U901.9 U901.12 U901.13 U1001.3 U1101.P$11 U1101.P$22 U1101.P$23 X503.P$11 X503.P$12
copper on no net: | length 1.1
  Bottom w6: 2789.4,2387.37 cw(c2789.9,2386.87) 2790.4,2387.37

## Polygon pours and split planes (outlines as drawn)
GND on Top "Top-GND 2" (solid, remove dead copper, shelved, pour order 22): 4126.4,2338.37 4188.4,2338.37 4188.4,2256.37 4126.4,2256.37
VDD_5V_HIPOWER on Top "Top-VDD_5V_HIPOWER" (solid, remove dead copper, shelved, pour order 74): 2850.4,2659.37 2850.4,2542.13 2856.16,2536.37 2890.64,2536.37 2896.4,2542.13 2896.4,2664.61 2890.64,2670.37 2856.16,2670.37 2850.4,2664.61
N$80 on Top "Top-N$80" (solid, remove dead copper, shelved, pour order 96): 3670.4,1942.37 3716.4,1942.37 3716.4,1832.37 3670.4,1832.37
VBUS on Top "Top-VBUS" (solid, remove dead copper, pour order 2): 4070.4,2228.37 4116.16,2228.37 4126.4,2218.13 4126.4,2190.13 4132.16,2184.37 4200.4,2184.37 4200.4,2228.61 4194.64,2234.37 4142.64,2234.37 4124.4,2252.61 4124.4,2280.61 4114.64,2290.37 4070.4,2290.37
GND on Top "Top-GND" (solid, remove dead copper, pour order 14): 1456.4,2672.37 1534.4,2672.37 1534.4,1086.37 1456.4,1086.37
GND on Top "Top-GND 1" (solid, remove dead copper, pour order 20): 3666.4,2028.61 3666.4,1962.13 3672.16,1956.37 3730.64,1956.37 3736.4,1962.13 3736.4,2028.61 3730.64,2034.37 3672.16,2034.37
GND on Top "Top-GND 3" (solid, remove dead copper, pour order 24): 4048.16,2154.37 4086.64,2154.37 4096.4,2144.61 4096.4,2082.13 4086.64,2072.37 4048.16,2072.37 4038.4,2082.13 4038.4,2144.61
GND on Top "Top-GND 4" (solid, remove dead copper, pour order 26): 4048.16,2062.37 4190.64,2062.37 4196.4,2056.61 4196.4,1982.13 4190.64,1976.37 4048.16,1976.37 4042.4,1982.13 4042.4,2056.61
GND on Top "Top-GND 5" (solid, remove dead copper, pour order 28): 3818.4,1860.61 3818.4,1708.61 3794.4,1684.61 3794.4,1518.13 3804.16,1508.37 3870.64,1508.37 3876.4,1514.13 3876.4,1860.61 3866.64,1870.37 3828.16,1870.37
GND on Top "Top-GND 6" (solid, remove dead copper, pour order 30): 3480.18,2478.39 3770.66,2474.35 3776.4,2468.61 3776.4,2218.13 3770.63,2212.35 3480.14,2216.39 3470.38,2226.15 3474.42,2472.63
GND on Top "Top-GND 7" (solid, remove dead copper, pour order 32): 2556.16,2516.37 2906.64,2516.37 2924.4,2534.13 2924.4,2678.37 2550.48,2678.37 2546.37,2526.16
GND on Top "Top-GND 8" (solid, remove dead copper, pour order 34): 3498.4,1790.37 3692.4,1790.37 3692.4,1604.37 3498.4,1604.37
GND on Top "Top-GND 9" (solid, remove dead copper, pour order 36): 4093.4,1743.37 4115.74,1743.37 4125.4,1753.03 4125.4,1777.03 4139.74,1791.37 4183.06,1791.37 4193.4,1781.03 4193.4,1701.71 4183.06,1691.37 4087.74,1691.37 4081.4,1697.71 4081.4,1737.03 4087.74,1743.37
FMU-VDD_3V3 on Top "Top-FMU-VDD_3V3" (solid, remove dead copper, pour order 40): 3698.4,1662.37 3744.16,1662.37 3746.4,1664.61 3746.4,1672.61 3756.16,1682.37 3790.64,1682.37 3796.4,1676.61 3796.4,1522.13 3786.64,1512.37 3756.16,1512.37 3746.4,1522.13 3746.4,1634.13 3744.16,1636.37 3698.4,1636.37
VDD_5V_IN on Top "Top-VDD_5V_IN" (solid, remove dead copper, pour order 42): 4088.4,2524.37 4198.4,2524.37 4198.4,1970.37 3908.4,1970.37 3908.4,2100.37 4088.4,2100.37 4088.4,2224.37 4124.4,2224.37 4124.4,2322.37 4088.4,2322.37 4088.4,2392.37 4124.4,2392.37 4124.4,2470.37 4088.4,2470.37
VDD_5V_IN on Top "Top-VDD_5V_IN 1" (solid, remove dead copper, pour order 52): 2844.4,2528.37 2844.4,2470.37 2906.4,2470.37 2906.4,2528.37
VDD_5V_IN on Top "Top-VDD_5V_IN 2" (solid, remove dead copper, pour order 56): 3500.4,1972.37 3622.4,1972.37 3622.4,1894.37 3500.4,1894.37
VDD_5V_PERIPH on Top "Top-VDD_5V_PERIPH" (solid, remove dead copper, pour order 60): 3882.4,2104.37 3882.4,2058.37 3824.4,2058.37 3824.4,2104.37
VDD_5V_PERIPH on Top "Top-VDD_5V_PERIPH 1" (solid, remove dead copper, pour order 62): 3828.16,2038.37 3908.16,2038.37 3940.16,2070.37 3982.64,2070.37 3988.4,2064.61 3988.4,1950.13 3982.64,1944.37 3828.16,1944.37 3822.4,1950.13 3822.4,2032.61
VDD_3V3_SENSORS on Top "Top-VDD_3V3_SENSORS" (solid, remove dead copper, pour order 66): 3816.4,1820.61 3816.4,1702.13 3794.64,1680.37 3754.64,1680.37 3730.64,1656.37 3700.16,1656.37 3694.4,1662.13 3694.4,1820.61 3704.16,1830.37 3806.64,1830.37
VDD_3V3_SENSORS on Top "Top-VDD_3V3_SENSORS 1" (solid, remove dead copper, pour order 68): 4070.64,1694.37 4186.64,1694.37 4192.4,1688.61 4192.4,1614.13 4186.64,1608.37 4012.16,1608.37 3994.4,1626.13 3994.4,1724.61 4012.16,1742.37 4050.64,1742.37 4064.4,1728.61 4064.4,1700.61
IO-VDD_3V3 on Top "Top-IO-VDD_3V3" (solid, remove dead copper, pour order 72): 1972.4,1442.13 1972.4,1492.61 1966.64,1498.37 1930.64,1498.37 1916.4,1512.61 1916.4,1540.61 1910.64,1546.37 1876.16,1546.37 1870.4,1540.61 1870.4,1458.13 1876.16,1452.37 1914.64,1452.37 1930.64,1468.37 1952.16,1468.37 1954.4,1466.13 1954.4,1442.13 1960.16,1436.37 1966.64,1436.37
FMU-VDD_5V5 on Top "Top-FMU-VDD_5V5" (solid, remove dead copper, pour order 82): 3533.4,1690.37 3654.64,1690.37 3668.4,1676.61 3668.4,1582.13 3654.64,1568.37 3524.16,1568.37 3510.4,1582.13 3510.4,1676.61 3524.16,1690.37
VDD_SERVO on Top "Top-VDD_SERVO" (solid, remove dead copper, pour order 86): 4066.19,2396.37 4116.16,2396.37 4132.16,2380.37 4188.4,2380.37 4188.4,2440.61 4166.64,2462.37 4070.59,2462.37
VDD_SERVO on Top "Top-VDD_SERVO 1" (solid, remove dead copper, pour order 88): 1552.4,2672.37 1634.4,2672.37 1634.4,1182.37 1552.4,1182.37
VDD_5V_BRICK on Top "Top-VDD_5V_BRICK" (solid, remove dead copper, pour order 92): 4070.4,2536.37 4192.4,2536.37 4192.4,2576.61 4182.64,2586.37 4138.64,2586.37 4132.4,2592.61 4132.4,2614.37 4070.4,2614.37
VBUS on Horizontal "Horizontal-VBUS" (solid, remove dead copper, pour order 4): 3988.4,2218.37 4083.47,2218.37 4094.4,2229.3 4094.4,2289.44 4083.47,2300.37 3988.4,2300.37
VDD_5V_IN on Horizontal "Horizontal-VDD_5V_IN" (solid, remove dead copper, pour order 54): 4000.16,2662.37 4186.64,2662.37 4200.4,2648.61 4200.4,1974.13 4186.62,1960.35 3936.14,1964.39 3922.4,1978.13 3922.4,2108.61 3936.16,2122.37 3976.16,2122.37 3986.4,2132.61 3986.4,2648.61
GND on Ground "Ground-GND" (solid, remove dead copper, pour order 6): 4202.4,2684.37 1440.4,2684.37 1440.4,1084.37 ccw(c1446.4,1084.37) 1446.4,1078.37 3537.4,1078.37 3537.4,1462.37 3866.4,1462.37 3866.4,1990.37 4144.4,1990.37 4144.4,1968.37 3888.4,1968.37 3888.4,1453.37 3549.4,1453.37 3549.4,1078.37 4202.4,1078.37
GND on Bottom "Bottom-GND" (solid, remove dead copper, pour order 8): 1744.4,1222.37 1744.4,1680.37 2154.4,1680.37 2154.4,1222.37
GND on Bottom "Bottom-GND 1" (solid, remove dead copper, pour order 10): 4022.4,2266.37 3832.4,2266.37 3832.4,2372.37 3938.4,2372.37 3938.4,2344.37 4022.4,2344.37
GND on Bottom "Bottom-GND 2" (solid, remove dead copper, pour order 12): 1456.4,2672.37 1534.4,2672.37 1534.4,1090.37 1456.4,1090.37
GND on Bottom "Bottom-GND 3" (solid, remove dead copper, pour order 16): 3644.4,1606.37 3644.4,1661.44 3660.43,1677.47 3668.48,2220.37 4138.4,2220.37 4138.4,1658.42 3743.49,1654.39 3726.4,1637.3 3726.4,1617.3 3715.47,1606.37
GND on Bottom "Bottom-GND 4" (solid, remove dead copper, pour order 18): 2824.4,2290.37 2824.4,2676.37 3238.4,2676.37 3238.4,2290.37
VDD_5V_IN on Bottom "Bottom-VDD_5V_IN" (solid, remove dead copper, pour order 46): 3450.4,1898.37 3296.4,1898.37 3296.4,2112.37 3450.4,2112.37
VDD_5V_IN on Bottom "Bottom-VDD_5V_IN 1" (solid, remove dead copper, pour order 48): 3460.4,1898.37 3460.4,2112.37 3494.4,2112.37 3494.4,1898.37
VDD_5V_IN on Bottom "Bottom-VDD_5V_IN 2" (solid, remove dead copper, pour order 50): 3504.4,1898.37 3504.4,2112.37 3662.4,2112.37 3662.4,1898.37
RGB_LED_3 on Bottom "Bottom-RGB_LED_3" (solid, remove dead copper, pour order 76): 3504.4,1868.37 3504.4,1662.37 3662.4,1662.37 3662.4,1868.37
RGB_LED_4 on Bottom "Bottom-RGB_LED_4" (solid, remove dead copper, pour order 78): 3460.4,1868.37 3460.4,1662.37 3494.4,1662.37 3494.4,1868.37
RGB_LED_14 on Bottom "Bottom-RGB_LED_14" (solid, remove dead copper, pour order 80): 3450.4,1868.37 3450.4,1662.37 3296.4,1662.37 3296.4,1868.37
VDD_SERVO on Bottom "Bottom-VDD_SERVO" (solid, remove dead copper, pour order 90): 1552.4,2672.37 1634.4,2672.37 1634.4,1182.37 1552.4,1182.37
VDD_5V_BRICK on Bottom "Bottom-VDD_5V_BRICK" (solid, remove dead copper, pour order 94): 3948.4,2462.37 4134.4,2462.37 4134.4,2576.37 3948.4,2576.37
FMU-VDD_3V3 on Power "Power-FMU-VDD_3V3" (solid, remove dead copper, pour order 38): 2576.4,1130.37 2576.4,1753.3 2275.33,2054.37 1996.4,2054.37 1996.4,2416.37 3130.4,2416.37 3130.4,2296.37 3762.4,2296.37 3762.4,1130.37
VDD_5V_IN on Power "Power-VDD_5V_IN" (solid, remove dead copper, pour order 44): 2808.4,2522.37 3944.4,2522.37 3944.4,2462.37 4202.4,2462.37 4202.4,2680.37 2808.4,2680.37
VDD_5V_PERIPH on Power "Power-VDD_5V_PERIPH" (solid, remove dead copper, pour order 58): 3878.4,1078.37 3878.4,2516.37 2328.4,2516.37 2328.4,2426.37 3136.4,2426.37 3136.4,2306.37 3768.4,2306.37 3768.4,1120.37 2576.4,1120.37 2576.4,1078.37
VDD_3V3_SENSORS on Power "Power-VDD_3V3_SENSORS" (solid, remove dead copper, pour order 64): 4202.4,1078.37 4202.4,1968.37 3888.4,1968.37 3888.4,1078.37
IO-VDD_3V3 on Power "Power-IO-VDD_3V3" (solid, remove dead copper, pour order 70): 1744.4,2032.37 1744.4,1078.37 2554.4,1078.37 2554.4,1741.44 2263.47,2032.37
VDD_SERVO on Vertical "Vertical-VDD_SERVO" (solid, remove dead copper, pour order 84): 4202.4,2684.37 4202.4,2362.37 4055.33,2362.37 3899.33,2518.37 2227.47,2518.37 2135.47,2426.37 1919.47,2426.37 1802.4,2309.3 1802.4,1962.37 1548.4,1962.37 1548.4,2684.37

## Keep-outs
Keep-Out Layer:
  lines w0: 1445.4,1111.37 ccw(c1473.4,1111.37) 1473.4,1083.37 2379.4,1083.37 cw(c2410.9,1083.87) 2410.4,1115.37 2489.4,1115.37 cw(c2488.9,1083.87) 2520.4,1083.37 4174.4,1083.37 ccw(c4173.9,1110.87) 4201.4,1111.37 4201.4,2650.37 ccw(c4173.9,2650.87) 4174.4,2678.37 2524.4,2678.37 cw(c2492.9,2677.87) 2493.4,2646.37 2414.4,2646.37 cw(c2414.4,2678.37) 2382.4,2678.37 1473.4,2678.37 ccw(c1473.4,2650.37) 1445.4,2650.37 1445.4,1111.37

## Silkscreen, mask and mechanical layers (free items; w line width, h text height)
Top Overlay:
  lines w20: 3925.4,1947.37 4053.4,1963.37 ; 3925.4,1979.37 4021.4,1963.37 ; 3973.4,1963.37 3909.4,1963.37 ; 3909.4,1963.37 3909.4,1931.37 4133.4,1963.37 3909.4,1995.37 3909.4,1963.37
  text "PX4FMU v2.4.6" at 2757.4,2395.37 h34
Bottom Overlay:
  circle w12: c3386.4,2188.37 r26
  circle w10: c2095.4,1172.37 r60
  circle w10: c1934.4,1172.37 r60
  circle w10: c1772.4,1172.37 r60
  circle w10: c1772.4,2589.37 r60
  circle w10: c1934.4,2589.37 r60
  lines w10: 3345.4,1792.37 ccw(c3384.4,1792.37) 3384.4,1753.37 3571.4,1753.37 ccw(c3571.9,1792.87) 3611.4,1792.37 3611.4,1979.37 ccw(c3571.4,1979.37) 3571.4,2019.37 3384.4,2019.37 ccw(c3384.9,1979.87) 3345.4,1979.37 3345.4,1792.37
  lines w12: 3386.4,2218.37 3386.4,2286.37 ; 3414.4,2188.37 3495.4,2188.37 ; 3495.4,2188.37 3475.4,2208.37 3475.4,2168.37 3495.4,2188.37 ; 3366.4,2278.37 3406.4,2278.37 3386.4,2298.37 3366.4,2278.37
  lines w16: 3369.4,2171.37 3401.4,2203.37 ; 3369.4,2203.37 3401.4,2171.37
  text "TLM" at 2776.26,2583.37 h25.5 r270
  text "FMU PWR" at 1763.91,2329.42 h25.5 r270
  text "FMU B/E" at 1923.91,2329.42 h25.5 r270
  text "USB" at 3083.91,2291.39 h25.5 r270
  text "Y" at 3354.4,2258.37 h77.5
  text "SER1" at 2783.91,2190.4 h25.5 r270
  text "SER2" at 2475.91,2177.9 h25.5 r270
  text "Z" at 3328.4,2153.37 h77.5
  text "SPI" at 3675.91,2151.89 h25.5 r270
  text "POWER" at 3979.91,2144.41 h25.5 r270
  text "X" at 3534.4,2118.37 h77.5
  text "SPKT" at 2119.91,1933.9 h25.5 r270
  text "ADC" at 3083.91,1699.39 h25.5 r270
  text "SWITCH" at 2475.91,1675.17 h25.5 r270
  text "BUZZER" at 2327.91,1642.92 h25.5 r270
  text "PX4FMU 2.4" at 3545.4,1535.37 h56.1
  text "SER4" at 2475.91,1517.9 h25.5 r270
  text "DEBUG" at 2431.91,1511.02 h25.5 r270
  text "(c) 2013 mjs/lm/jo" at 2276.4,1440.37 h49.6
  text "IO PWR" at 1763.91,1263.17 h25.5 r270
  text "IO B/E" at 1923.91,1263.17 h25.5 r270
  text "IO ACT" at 2083.91,1262.17 h25.5 r270
  text "AIR" at 3979.91,1163.64 h25.5 r270
  text "I2C" at 3675.91,1151.64 h25.5 r270
  text "CAN" at 3083.91,1147.39 h25.5 r270
  text "GPS" at 2733.4,1123.74 h25.5 r270
  text "SER3" at 2779.91,1121.9 h25.5 r270
Dimension:
  lines w0: 1445.4,1111.37 ccw(c1473.4,1111.37) 1473.4,1083.37 2379.4,1083.37 cw(c2410.9,1083.87) 2410.4,1115.37 2489.4,1115.37 cw(c2488.9,1083.87) 2520.4,1083.37 4174.4,1083.37 ccw(c4173.9,1110.87) 4201.4,1111.37 4201.4,2650.37 ccw(c4173.9,2650.87) 4174.4,2678.37 2524.4,2678.37 cw(c2492.9,2677.87) 2493.4,2646.37 2414.4,2646.37 cw(c2414.4,2678.37) 2382.4,2678.37 1473.4,2678.37 ccw(c1473.4,2650.37) 1445.4,2650.37 1445.4,1111.37
Document:
  text "Optimized for good" at 1858.2,2284.37 h49.6 r90
  text "manual soldering" at 1907.8,2284.37 h49.6 r90
  text "accessibility" at 1957.4,2284.37 h49.6 r90
Unrouted:
  lines w0: 1000,1000 1785.4,1383.37 ; 1037.4,1082.68 1593.4,1128.37 ; 1074.8,1000 1786.4,1334.37

## Text inside footprints (layer, text, board x,y; h text height)
B601: tDocu "6.8MM" at 2142.16,2185.56 h37.2
U301: bDocu "card IN" at 4201.4,1795.81 h49.6 r270; bDocu "card OUT" at 4350.4,1772.19 h49.6 r270
U501: tDocu "X" at 3969.84,1535.37 h17 r270; tDocu "Y" at 4049.4,1610.99 h17 r270; tDocu "Z" at 3969.84,1614.93 h17 r270
U505: Top Overlay "X" at 3997.97,1827.37 h10.2 r90; Top Overlay "Y" at 4057.4,1882.74 h10.2 r90; Top Overlay "Z" at 3990.09,1886.68 h10.2 r90